# Allegro board CC1350SensorTag.brd
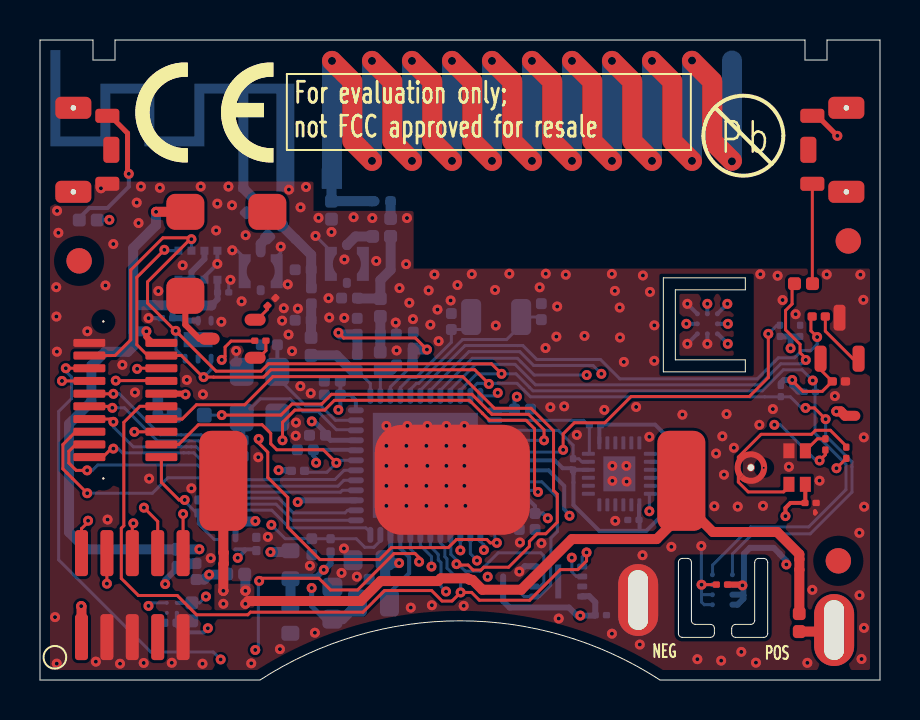
[diagram p0: board, top side]
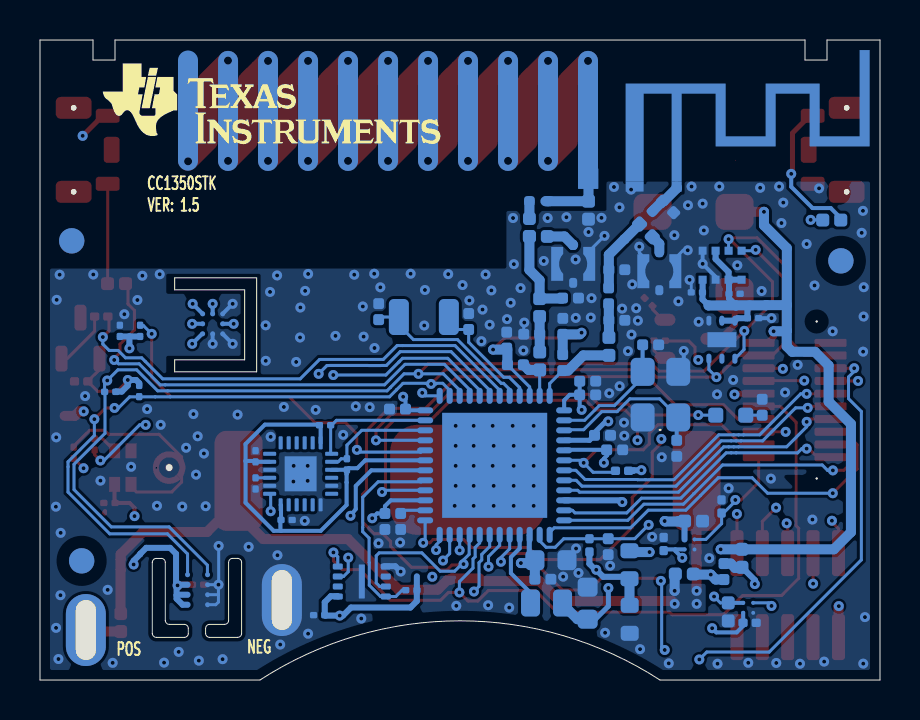
[diagram p1: board, bottom side, seen from below]

Outline 42 x 32 mm; copper layers: TOP, L2, L3, BOTTOM. Coordinates in mm from the lower left corner of the outline.
Outline path: 0,32 0,0 11,0 arc(21,2.96) 31,0 42,0 42,32 39.35,32 39.35,31 38.25,31 38.25,32 3.75,32 3.75,31 2.65,31 2.65,32 0,32 ; 31.17,20.11 31.17,15.41 35.27,15.41 35.27,16.01 31.77,16.01 31.77,19.51 35.27,19.51 35.27,20.11 31.17,20.11 ; 31.92,5.88 31.92,2.33 arc(31.98,2.19) 32.12,2.13 33.52,2.13 arc(33.66,2.19) 33.72,2.33 33.72,2.58 arc(33.66,2.72) 33.52,2.78 32.77,2.78 arc(32.63,2.84) 32.57,2.98 32.57,5.88 arc(32.51,6.02) 32.37,6.08 32.12,6.08 arc(31.98,6.02) 31.92,5.88 ; 34.58,2.58 arc(34.64,2.72) 34.78,2.78 35.53,2.78 arc(35.68,2.84) 35.73,2.98 35.73,5.88 arc(35.79,6.02) 35.93,6.08 36.18,6.08 arc(36.33,6.02) 36.38,5.88 36.38,2.33 arc(36.33,2.19) 36.18,2.13 34.78,2.13 arc(34.64,2.19) 34.58,2.33 34.58,2.58

## Placement (name value [footprint] x y rotation side)
A1  2.4GHz  [ANTENNA_AN043AN_BN]  10.17 24.67 180 bottom
A2  #VALUE  [ANTENNA868_915MHZ_MIRROR]  14.6 20.03 180 bottom
ANT2  0.5pF  [CAPC1005X60B2N]  12.02 22.8 135 bottom
ANT3  0.4pF  [CAPC1005X60N#2]  10.88 23.93 225 bottom
ANT4  10nH  [INDC1005X60B2N]  17.53 23.94 180 bottom
ANT5  4.7pF  [CAPC1005X60N]  14.57 23.94 270 bottom
BAT+1  BAT+  [PAD_S2000OBL3600_1000M3000]  39.71 2.5 0 top
BAT-1  BAT-  [PAD_S2000OBL3600_1000M3000]  29.91 4 0 top
BT1  BAT-HLD-001  [BAT_BATHLD001N]  32.07 9.96 180 top
BZ1  HCS0503B  [BUZ_HCS0503BN]  7.27 23.41 270 top
C1  DNM  [CAPC1608X90L]  12.52 3.74 270 bottom
C2  100nF  [CAPC1005X60L]  23.73 13.55 0 bottom
C3  100nF  [CAPC1005X60L]  24.75 8.33 270 bottom
C4  100nF  [CAPC1005X60L]  13.67 11.51 180 bottom
C5  22uF  [CAPC1608X100A2N]  17.25 5.99 180 bottom
C6  100nF  [CAPC1005X60L]  17.26 5.04 180 bottom
C7  22uF  [CAPC1608X100A2N]  14.62 3.04 90 bottom
C8  100nF  [CAPC1005X60L]  15.02 14.26 180 bottom
C9  100nF  [CAPC1005X60L]  14.28 12.23 180 bottom
C10  DNM_0402  [CAPC1005X60L]  14.21 14.94 0 bottom
C11  15pF  [CAPC1005X60N]  13.55 16.23 90 bottom
C12  1pF  [CAPC1005X60L]  12.76 17.99 0 bottom
C13  1pF  [CAPC1005X60L]  12.76 20.51 0 bottom
C14  120pF  [CAPC1005X60N]  17.01 15.5 90 bottom
C15  5.6pF  [CAPC1005X60N#2]  17.01 17.29 0 bottom
C16  1.8pF  [CAPC1005X60N#2]  15.88 19.1 180 bottom
C17  100nF  [CAPC1005X60L]  13.59 7.07 270 bottom
C18  12pF  [CAPC1005X60L]  20.57 17.52 90 bottom
C19  12pF  [CAPC1005X60L]  25.07 18.02 90 bottom
C20  1uF  [CAPC1005X60L]  23.97 8.33 270 bottom
C21  DNM_0402  [CAPC1005X60L]  11.07 16.76 0 bottom
C22  DNM_0402  [CAPC1005X60L]  10.16 11.19 90 bottom
C23  68pF  [CAPC1005X60L]  18.66 16.59 90 bottom
C24  6.8pF  [CAPC1005X60L]  15.86 17.28 90 bottom
C27  100nF  [CAPC0603X35N#2]  27.76 3.24 0 bottom
C28  100nF  [CAPC0603X35N#2]  8.88 19.38 0 bottom
C29  100nF  [CAPC0603X35N#2]  7.55 19.31 180 bottom
C30  100nF  [CAPC0603X35N#2]  38.01 17.18 90 bottom
C31  100nF  [CAPC0603X35N#2]  34.38 4.77 180 top
C32  100nF  [CAPC0603X35N#2]  38.25 8.85 0 top
C33  100nF  [CAPC0603X35N#2]  6.63 18.09 180 bottom
C34  100nF  [CAPC0603X35N#2]  29.95 8 180 bottom
C35  10nF  [CAPC0603X35L]  31.22 10.91 90 bottom
C36  100nF  [CAPC0603X35N#2]  31.22 9.55 90 bottom
C37  100nF  [CAPC0603X35N]  39.61 14.93 0 top
C40  100nF  [CAPC0603X35N]  10.82 6.47 90 bottom
C41  1uF  [CAPC1005X60N]  9.77 7.95 180 bottom
C42  1uF  [CAPC1005X60N]  7.59 3.86 270 bottom
C43  100nF  [CAPC0603X35N]  6.85 2.86 180 bottom
CR1  LS L296-P2Q2-1  [LEDC1708X67L]  6.71 13.24 0 bottom
FIDU1  FIDU_1.27mm  [FID127X142]  40.41 21.95 0 top
FIDU2  FIDU_1.27mm  [FID127X142]  39.92 5.96 0 top
FIDU3  FIDU_1.27mm  [FID127X142]  1.96 20.96 0 top
FIDU4  FIDU_1.27mm  [FID127X142]  1.96 20.96 180 bottom
FIDU5  FIDU_1.27mm  [FID127X142]  40.41 21.96 180 bottom
FIDU6  FIDU_1.27mm  [FID127X142]  39.92 5.96 180 bottom
FL1  BLM18HE152SN1  [FIL_BLM18HE152SN1DL]  12.53 5.06 90 bottom
J1  LSS-110-01-F-DV-A-TR  [SAMTEC_LSS-110-01-F-DV-A-TR-20N]  6.07 16.86 180 top
J10  MM5829-2700  [MURATA_MM58292700RJ4_A2N]  15.34 21.76 270 bottom
J12  MM5829-2700  [MURATA_MM58292700RJ4_A2N]  11.04 21.39 270 bottom
L1  6.8uH  [INDC2012X150L]  17.47 3.85 180 bottom
L2  2.4nH  [INDC1005X60L]  13.57 18.81 90 bottom
L7  5.6nH  [INDC1005X60N]  17.02 18.17 90 bottom
L15  68nH  [INDC1005X60L]  18.63 15.76 180 bottom
L16  15nH  [INDC1005X60L]  15.87 16.27 270 bottom
LBL1  -  [LABEL_FOR_EVALUATION_ONLY]  12.49 26.65 0 top
LBL2  CE_label  [CE_LABEL]  7.39 25.88 0 top
NOREF  -  []  0 31.7 0 top
NOREF#2  -  []  38.25 31.41 0 top
NOREF#3  -  []  39.35 31.5 0 top
NOREF#4  -  []  3.16 31 90 top
NOREF#5  -  []  35.34 2.13 90 top
NOREF#6  -  []  31.17 18.42 0 top
NOREF#7  -  []  34.44 19.51 90 top
NOREF#8  -  []  41.33 0 90 top
NOREF#9  -  []  3.75 31.49 0 top
NOREF#10  -  []  31.92 3.6 0 top
NOREF#11  -  []  36.32 24.95 180 bottom
P1  BB02-BS101-KA8-025B00  [GRADCON_BB02BS101KA8025B00N]  2.08 2.14 0 top
Q1  BC846B  [SOT95P237X130-3N]  10.76 16.11 90 top
R1  100k  [RESC0603X35N#2]  14.53 7.06 270 bottom
R2  10k  [RESC0603X35N]  27.47 12.74 0 bottom
R3  10k  [RESC0603X35N]  26.65 11.06 270 bottom
R4  10k  [RESC0603X35N]  38.77 14.41 180 bottom
R5  10k  [RESC0603X35N]  37.04 14.17 90 bottom
R6  200k  [RESC0603X35N#2]  12.57 10.46 0 bottom
R7  10k  [RESC0603X35N]  11.3 16.96 180 top
R8  5.1  [RESC0603X35L]  11.77 19.1 225 top
R9  0  [RESC1005X40A2N]  6.9 6.54 270 bottom
R10  0  [RESC1005X40A2N]  16.63 22.18 0 bottom
R11  0  [RESC1005X40A2N]  17.53 23.07 270 bottom
R12  0  [RESC1005X40A2N]  10.23 5.3 180 bottom
R13  2.2k  [RESC0603X35N]  23.71 4.49 180 bottom
R16  680  [RESC1005X40N#2]  5.89 14.04 270 bottom
R17  270  [RESC1005X40N]  38.62 19.82 180 top
R18  270  [RESC1005X40N]  1.96 23 0 bottom
R19  0  [RESC0603X35N#2]  38.61 18.18 0 top
R20  2.2k  [RESC0603X35L]  36.99 17.74 270 bottom
R21  0  [RESC0603X35N]  40.31 11.64 270 top
R22  0  [RESC0603X35N]  39.27 12.06 270 top
R23  DNM  [RESC1005X40N#2]  7.8 5.82 270 bottom
R24  0  [RESC1005X40A2N]  11.38 22.16 45 bottom
R26  0  [RESC1005X40A2N]  37.96 2.42 90 top
R28  100k  [RESC0603X35N#2]  7.92 9.01 270 bottom
SW1  MTA2-WNC  [SW_MTA2AN]  38.62 28.21 270 top
SW2  MTA2-WNC  [SW_MTA2AN]  3.37 24.81 90 top
U1  CC1350F128RGZ  [QFNFC50P700X700X80-49CN]  16.52 14.21 0 bottom
U2  TPS22910AYZV  [BGAFC4C50P89X89X50]  9.77 6.53 180 bottom
U3  BMP280  [XDCR_BMP280N]  8.87 21.46 270 bottom
U4  TMP007  [BGAFC8C50P187X189X63]  32.87 17.31 90 bottom
U5  HDC1000YPA  [BGAFC8C50P159X204X68]  34.62 5.26 270 bottom
U6  SPH0641LM4H-1  [MIC_SPH0641LM4H-1AN]  38.27 11.46 180 top
U7  OPT3001  [SON65P200X200X65-7N]  7.25 17.97 0 bottom
U8  MPU-9250  [QFNFC40P300X300X105-25L]  27.97 11.86 0 bottom
U9  DRV5032FBDBZR  [SOT95P237X112-3A2N]  39.03 16.07 0 top
U10  MX25R8035FZUIL0  [SON50P300X200X60-9B2N]  24.71 4.17 90 bottom
U11  TPS22910AYZV  [BGAFC4C50P89X89X50]  6.84 3.36 180 bottom
Y1  32.768kHz  [XTAL_FC-135N]  21.56 18.15 0 bottom
Y2  24MHz  [OSCCC250X320X60-4N]  11.87 15.41 270 bottom

## Library data of the parts
A1 = ANTENNA_AN043
A2 = ANTENNA: User Part Number: #PN
ANT2 ANT5 = CAPACITOR: User Part Number: #PN
ANT3 C2-C4 C6 C8-C10 C12 C13 C16-C24 = CAPACITOR: alternate symbols: (CAPC1005X60L,CAPC1005X60M)
ANT4 = INDUCTOR: User Part Number: #PN
BAT+1 = BAT+
BAT-1 = BAT-
BT1 = BATT_3PINS: User Part Number: #PN; alternate symbols: (BAT_BATHLD001L,BAT_BATHLD001M,BAT_BATHLD001AL,BAT_BATHLD001AM)
BZ1 = BUZZER_3PINS: alternate symbols: (BUZ_HCS0503BL,BUZ_HCS0503BM)
C1 = CAPACITOR: alternate symbols: (CAPC1608X90L,CAPC1608X90M)
C5 C7 = CAPACITOR: User Part Number: #PN; alternate symbols: (CAPC1608X100A2L,CAPC1608X100A2M)
C11 C14 C41 C42 = CAPACITOR: User Part Number: #PN; alternate symbols: (CAPC1005X60L,CAPC1005X60M)
C15 = CAPACITOR: alternate symbols: (CAPC1005X60M,CAPC1005X60L)
C27-C37 C40 C43 = CAPACITOR: alternate symbols: (CAPC0603X35L,CAPC0603X35M)
CR1 = LED: alternate symbols: (LEDC1708X67L,LEDC1708X67M)
FIDU1-FIDU6 = FIDMARK
FL1 = FILTER_2PIN: alternate symbols: (FIL_BLM18HE152SN1DL,FIL_BLM18HE152SN1DM)
J1 = CONN_SOCKET_2X10_J_V1: alternate symbols: (SAMTEC_LSS-110-01-F-DV-A-TR-20L,SAMTEC_LSS-110-01-F-DV-A-TR-20M)
J10 J12 = CONN_COAX_1_1_P_2MH_V1: User Part Number: #PN; alternate symbols: (MURATA_MM58292700RJ4_A2L,MURATA_MM58292700RJ4_A2M)
L1 = INDUCTOR: alternate symbols: (INDC2012X150L,INDC2012X150M)
L2 L7 L16 = INDUCTOR: alternate symbols: (INDC1005X60L,INDC1005X60M)
L15 = INDUCTOR: alternate symbols: (IND_LQW15AL,IND_LQW15AM,INDC1005X60L,INDC1005X60M)
LBL1 = LABEL_FOR_EVALUATOIN_ONLY: User Part Number: #PN
LBL2 = CE_LABEL
P1 = CONN_HEADER_2X5_P: User Part Number: #PN; alternate symbols: (GRADCON_BB02BS101KA8025B00L,GRADCON_BB02BS101KA8025B00M)
Q1 = TRANSISTOR_NPN_BEC_CIR: alternate symbols: (SOT95P237X130-3L,SOT95P237X130-3M)
R1-R8 R13 R19-R22 R28 = RESISTOR: alternate symbols: (RESC0603X35L,RESC0603X35M)
R9-R12 R24 R26 = RESISTOR: alternate symbols: (RESC1005X40A2L,RESC1005X40A2M)
R16-R18 R23 = RESISTOR: alternate symbols: (RESC1005X40L,RESC1005X40M)
SW1 SW2 = SWITCH_2PIN
U1 = IC_RF_CC13XX_7X7_QFN48_V2: alternate symbols: (QFNFC50P700X700X80-49CL,QFNFC50P700X700X80-49CM)
U2 U11 = IC_PM_TPS22910A_DSBGA4: User Part Number: #PN
U3 = IC_PERIPH_BMP280
U4 = IC_PERIPH_TMP007_DSBGA8: User Part Number: #PN
U5 = IC_PERIPH_HDC1000_BGA8: User Part Number: #PN
U6 = IC_PERIPH_SPH0641LM4H-1
U7 = IC_PERIPH_OPT3001_SON6: User Part Number: #PN; alternate symbols: (SON65P200X200X65-7L,SON65P200X200X65-7M)
U8 = IC_ACC_MPU-9250_QFN24: alternate symbols: (QFNFC40P300X300X105-25L,QFNFC40P300X300X105-25M)
U9 = IC_PERIPH_DRV5032_SOT23-3: User Part Number: #PN; alternate symbols: (SOT95P237X112-3A2L,SOT95P237X112-3A2M)
U10 = IC_FLASH_MX25R8035F_USON8: User Part Number: #PN; alternate symbols: (SON50P300X200X60-9B2L,SON50P300X200X60-9B2M)
Y1 = CRYSTAL: alternate symbols: (XTAL_FC-135L,XTAL_FC-135M)
Y2 = XTAL_4PIN_S: alternate symbols: (OSCCC250X320X60-4L,OSCCC250X320X60-4M)

## Footprints (pads in the part's own frame, mm; a bottom-side part is the same pattern mirrored in y, then rotated)
ANTENNA868_915MHZ_MIRROR
  rect 1x1 smd: 1(0.014,5.033)
ANTENNA_AN043AN_BN
  rect 0.5x0.5 smd: 1(0,0)
  rect 0.9x0.5 smd: 2(-2.1,0)
BAT_BATHLD001N
  custom 2.4x5 smd: 1(0,0) 2(22.9,0)
  custom 7.75x5.5 smd: 3(11.45,-0.05)
BGAFC4C50P89X89X50
  round 0.2 smd: A1(0,0) A2(0,0.5) B1(0.5,0) B2(0.5,0.5)
BGAFC8C50P159X204X68
  round 0.25 smd: A1(0,0) A2(0,1) B1(0.5,0) B2(0.5,1) C1(1,0) C2(1,1) D1(1.5,0) D2(1.5,1)
BGAFC8C50P187X189X63
  round 0.25 smd: A1(0,0) A2(0,0.5) A3(0,1) B1(0.5,0) B3(0.5,1) C1(1,0) C2(1,0.5) C3(1,1)
BUZ_HCS0503BN
  custom 1.798x1.9 smd: 1(0,0) 2(4.2,0) 3(0,4.1)
CAPC0603X35L
  custom 0.36x0.32 smd: 1(0,0) 2(0.56,0)
CAPC0603X35N
  custom 0.46x0.42 smd: 1(0,0) 2(0.66,0)
CAPC0603X35N#2
  custom 0.36x0.32 smd: 1(0,0) 2(0.56,0)
CAPC1005X60B2N
  custom 0.525x0.5 smd: 1(0,0) 2(0.924,0)
CAPC1005X60L
  custom 0.55x0.54 smd: 1(0,0) 2(0.8,0)
CAPC1005X60N
  custom 0.65x0.64 smd: 1(0,0) 2(0.9,0)
CAPC1005X60N#2
  custom 0.55x0.54 smd: 1(0,0) 2(0.8,0)
CAPC1608X90L
  custom 0.75x0.9 smd: 1(0,0) 2(1.4,0)
CAPC1608X100A2N
  custom 0.95x1 smd: 1(0,0) 2(1.6,0)
CE_LABEL
  oval 0.025x0.051 smd: 1(-0.15,0.1)
FID127X142
  round 1.27 smd: 1(0,0)
FIL_BLM18HE152SN1DL
  custom 0.75x0.9 smd: 1(0,0) 2(1.4,0)
GRADCON_BB02BS101KA8025B00N
  custom 0.65x2.3 smd: 1(0,0) 2(0,4.2) 3(1.27,0) 4(1.27,4.2) 5(2.54,0) 6(2.54,4.2) 7(3.81,0) 8(3.81,4.2) 9(5.08,0) 10(5.08,4.2)
INDC1005X60B2N
  custom 0.525x0.5 smd: 1(0,0) 2(0.924,0)
INDC1005X60L
  custom 0.55x0.54 smd: 1(0,0) 2(0.8,0)
INDC1005X60N
  custom 0.65x0.64 smd: 1(0,0) 2(0.9,0)
INDC2012X150L
  custom 0.95x1.35 smd: 1(0,0) 2(1.6,0)
LEDC1708X67L
  custom 0.75x0.75 smd: 1(0,0) 2(1.5,0)
MIC_SPH0641LM4H-1AN
  custom 1.626x1.626 hole 0.325 unplated: (2.724,0.838)
  rect 0.55x0.75 smd: 1(0,0) 2(0.822,0) 4(0.822,1.675) 5(0,1.675)
MURATA_MM58292700RJ4_A2N
  custom 0.5x0.4 smd: 1(0,0) 2(1.9,0)
  custom 1.7x0.6 smd: M1(0.95,-0.8) M2(0.95,0.8)
OSCCC250X320X60-4N
  custom 1.4x1.2 smd: 1(0,0) 2(2.28,0) 3(2.28,1.78) 4(0,1.78)
PAD_S2000OBL3600_1000M3000
  oval 2x3.6 hole 1x3: 1(0,0)
QFNFC40P300X300X105-25L
  custom 0.2x0.65 smd: 1(0,0) 2(0.4,0) 3(0.8,0) 4(1.2,0) 5(1.6,0) 6(2,0) 13(2,3.1) 14(1.6,3.1) 15(1.2,3.1) 16(0.8,3.1) 17(0.4,3.1) 18(0,3.1)
  custom 0.65x0.2 smd: 7(2.55,0.55) 8(2.55,0.95) 9(2.55,1.35) 10(2.55,1.75) 11(2.55,2.15) 12(2.55,2.55) 19(-0.55,2.55) 20(-0.55,2.15) 21(-0.55,1.75) 22(-0.55,1.35) 23(-0.55,0.95) 24(-0.55,0.55)
  rect 1.6x1.75 smd: 25(1,1.55)
QFNFC50P700X700X80-49CN
  oval 0.3x0.8 smd: 1(0,0) 2(0.5,0) 3(1,0) 4(1.5,0) 5(2,0) 6(2.5,0) 7(3,0) 8(3.5,0) 9(4,0) 10(4.5,0) 11(5,0) 12(5.5,0) 25(5.5,6.95) 26(5,6.95) 27(4.5,6.95) 28(4,6.95) 29(3.5,6.95) 30(3,6.95) 31(2.5,6.95) 32(2,6.95) 33(1.5,6.95) 34(1,6.95) 35(0.5,6.95) 36(0,6.95)
  oval 0.8x0.3 smd: 13(6.225,0.725) 14(6.225,1.225) 15(6.225,1.725) 16(6.225,2.225) 17(6.225,2.725) 18(6.225,3.225) 19(6.225,3.725) 20(6.225,4.225) 21(6.225,4.725) 22(6.225,5.225) 23(6.225,5.725) 24(6.225,6.225) 37(-0.725,6.225) 38(-0.725,5.725) 39(-0.725,5.225) 40(-0.725,4.725) 41(-0.725,4.225) 42(-0.725,3.725) 43(-0.725,3.225) 44(-0.725,2.725) 45(-0.725,2.225) 46(-0.725,1.725) 47(-0.725,1.225) 48(-0.725,0.725)
  rect 5.25x5.25 smd: 49(2.75,3.475)
RESC0603X35L
  custom 0.36x0.32 smd: 1(0,0) 2(0.56,0)
RESC0603X35N
  custom 0.36x0.32 smd: 1(0,0) 2(0.56,0)
RESC0603X35N#2
  custom 0.46x0.42 smd: 1(0,0) 2(0.66,0)
RESC1005X40A2N
  custom 0.65x0.64 smd: 1(0,0) 2(0.9,0)
RESC1005X40N
  custom 0.65x0.64 smd: 1(0,0) 2(0.9,0)
RESC1005X40N#2
  custom 0.55x0.54 smd: 1(0,0) 2(0.8,0)
SAMTEC_LSS-110-01-F-DV-A-TR-20N
  round 0.1 hole 0.9 unplated: (2.9,6.782) (2.9,-1.067)
  custom 1.6x0.4 smd: 1(0,0) 2(3.6,0) 3(0,0.635) 4(3.6,0.635) 5(0,1.27) 6(3.6,1.27) 7(0,1.905) 8(3.6,1.905) 9(0,2.54) 10(3.6,2.54) 11(0,3.175) 12(3.6,3.175) 13(0,3.81) 14(3.6,3.81) 15(0,4.445) 16(3.6,4.445) 17(0,5.08) 18(3.6,5.08) 19(0,5.715) 20(3.6,5.715)
SON50P300X200X60-9B2N
  custom 0.3x0.5 smd: 1(0,0) 2(0.5,0) 3(1,0) 4(1.5,0) 5(1.5,2.4) 6(1,2.4) 7(0.5,2.4) 8(0,2.4)
  rect 1.7x0.3 smd: 9(0.75,1.2)
SON65P200X200X65-7N
  oval 0.25x0.5 smd: 1(0,0) 2(0.65,0) 3(1.3,0) 4(1.3,1.9) 5(0.65,1.9) 6(0,1.9)
  rect 1.45x0.75 smd: 7(0.65,0.95)
SOT95P237X112-3A2N
  custom 0.6x1.3 smd: 1(0,0) 2(1.9,0) 3(0.95,2.05)
SOT95P237X130-3N
  oval 0.6x1.05 smd: 1(0,0) 2(1.9,0) 3(0.95,2.3)
SW_MTA2AN
  custom 1.1x1.8 hole 0.9: (-0.4,1.7) (3.8,1.7)
  custom 1.3x0.8 smd: (1.7,-0.2)
  custom 0.7x1.2 smd: 1(0,0) 2(3.4,0)
XDCR_BMP280N
  rect 0.4x0.4 smd: 1(0,0) 2(0,0.65) 3(0,1.3) 4(0,1.95) 5(1.45,1.95) 6(1.45,1.3) 7(1.45,0.65) 8(1.45,0)
XTAL_FC-135N
  custom 1x1.8 smd: 1(0,0) 2(2.5,0)

## Nets
GND: A1.2(FEED) ANT3.2 ANT5.2 BAT-1.1 BT1.3(-) C1.2 C2.2 C3.2 C4.2 C5.2 C6.2 C7.2 C8.2 C9.2 C10.1 C12.1 C13.1 C15.2 C16.2 C17.2 C18.2 C19.2 C20.2 C21.1 C22.1 C23.2 C24.2 C27.2 C28.2 C29.2 C30.2 C31.2 C32.2 C33.2 C34.2 C35.2 C36.1 C37.2 C40.2 C41.2 C42.2 C43.2 J1.2 J10.2 J10.M1 J10.M2 J12.2 J12.M1 J12.M2 P1.3 P1.5 P1.9 R8.1 R16.1 R28.1 SW1.1 SW2.1 U1.49(VSS) U2.B1(GND) U3.1(GND#1) U3.7(GND#7) U4.A1(DGND) U4.A2(AGND) U4.C1(ADR0) U5.B2(GND) U5.C2(DNC) U5.D2(NDRDY) U6.2(SELECT) U7.3(GND) U7.7(EGP/GND) U8.9(AD0/SDO) U8.11(FSYNC) U8.18(GND) U8.20(RESV_20) U8.25(EGP) U9.3(GND) U10.4(GND) U10.9(EGP) U11.B1(GND) Y2.2 Y2.4
VDD: BZ1.1 C27.1 C28.1 C29.1 C30.1 C31.1 C33.1 C37.1 C43.1 FL1.2 J1.1 P1.1 R4.2 R5.2 R6.1 R9.1 R13.2 R20.2 U1.39(DIO_26) U3.2(CSB) U3.5(SDO) U3.6(VDDIO) U3.8(VDD) U4.A3(V+) U4.B1(ADR1) U5.B1(VDD) U5.C1(ADR0) U5.D1(ADR1) U7.1(VDD) U7.2(ADDR) U9.1(VCC) U10.8(VCC) U11.A1(VOUT)
VDD_BATT: BT1.1(+#1) BT1.2(+#2) R12.1 R26.2
VDDR: C7.1 C8.1 C9.1 C10.2 L1.2 U1.45(VDDR#45) U1.48(VDDR#48)
VDDS: C1.1 C2.1 C3.1 C4.1 C5.1 C6.1 FL1.1 R1.2 U1.13(VDDS2) U1.22(VDDS3) U1.34(VDDS_DCDC) U1.44(VDDS)
AUDIO DI: R22.2 U1.7(DIO_2)
BUTTON1: R17.2 U1.9(DIO_4)
BUTTON2: R18.2 U1.21(DIO_15)
BUZZER: R7.2 U1.31(DIO_21)
DCDC_SW: L1.1 U1.33(DCDC_SW)
DEVPACK->VDD: J1.9 R9.2 R23.1
DP0: J1.20 U1.38(DIO_25)
DP1: J1.18 U1.37(DIO_24)
DP2: J1.16 U1.36(DIO_23)
DP3: J1.14 U1.40(DIO_27)
DP4/UART_RX: J1.12 U1.41(DIO_28)
DP5/UART_TX: J1.10 U1.42(DIO_29)
DP6/AUDIO DO: J1.8 U1.32(DIO_22)
DP7/AUDIO CLK: J1.6 R21.2 U1.8(DIO_3)
DP8/SCLK/TDI: J1.15 P1.8 U1.27(DIO_17) U10.6(SCLK)
DP9/MISO: J1.13 U1.28(DIO_18) U10.2(SO/SIO1)
DP10/MOSI: J1.11 U1.29(DIO_19) U10.5(SI/SIO0)
DP11/CSN: J1.7 U1.30(DIO_20)
DP12/AUDIO FS/TDO: J1.5 P1.6 U1.26(DIO_16)
DP ID: J1.17 R6.2 U1.43(DIO_30)
FLASH_CS: R13.1 U1.20(DIO_14) U10.1(NCS)
JTAG_TCK: P1.4 U1.25(JTAG_TCKC)
JTAG_TMS: P1.2 U1.24(JTAG_TMSC)
LED1: CR1.2(A) U1.16(DIO_10)
MIC PWR: C32.1 U1.19(DIO_13) U6.5(VDD)
MPU INT: U1.12(DIO_7) U8.12(INT)
MPU PWR: C34.1 C35.1 R2.2 R3.2 U1.18(DIO_12) U8.1(RESV_1) U8.8(VDDIO) U8.13(VDD) U8.22(NCS)
NRESET: C17.1 P1.10 R1.1 U1.35(RESET_N)
POWER GOOD: J1.19 R28.2 U2.B2(ON) U11.B2(ON)
REED: R19.1 U1.6(DIO_1)
RX/TX: C23.1 C24.1 L15.1 L16.1 U1.3(RX_TX)
SCL: J1.3 R5.1 U1.11(DIO_6) U3.4(SCK) U4.B3(SCL) U5.A1(SCL) U7.4(NCLK)
SCL HP: R3.1 U1.15(DIO_9) U8.23(SCL/SCLK)
SDA: J1.4 R4.1 U1.10(DIO_5) U3.3(SDI) U4.C3(SDA) U5.A2(SDA) U7.6(DATA)
SDA HP: R2.1 U1.14(DIO_8) U8.24(SDA/SDI)
TMP RDY: R20.1 U1.17(DIO_11) U4.C2(NALERT)
N256047: CR1.1(C) R16.2
N540621: R22.1 U6.1(DATA)
N546170: C36.2 U8.10(REGOUT)
N553359: BZ1.2 Q1.3(COLLECTOR)
N553749: Q1.1(BASE) R7.1
N553802: Q1.2(EMITTER) R8.2
N567147: C41.1 R12.2 R23.2 U2.A2(VIN)
N570925: C20.1 U1.23(DCOUPL)
N571021: C18.1 U1.4(X32K_Q1) Y1.1
N584167: C21.2 U1.47(X24M_P) Y2.1
N584795: C22.2 U1.46(X24M_N) Y2.3
N593616: R17.1 SW1.2
N593675: R18.1 SW2.2
N595089: C19.1 U1.5(X32K_Q2) Y1.2
N615347: R21.1 U6.4(CLOCK)
N620089: BAT+1.1 R26.1
N635643: C40.1 C42.1 U2.A1(VOUT) U11.A2(VIN)
N643348: C14.2 C15.1 L7.1
N647149: A1.1(GND) ANT2.2 ANT3.1
N651267: C11.1 L16.2 U1.1(RF_P)
N651373: C11.2 C12.2 L2.1
N651497: ANT2.1 C13.2 L2.2 R24.2
N652643: C14.1 L15.2 U1.2(RF_N)
N654018: A2.1(FEED/GND_1) ANT4.2 ANT5.1
N667700: C16.1 L7.2 R10.2 R11.2
N684660: J10.1 R10.1
N686248: J12.1 R24.1
N721382: R19.2 U9.2(OUT)
N6819820: ANT4.1 R11.1

Pads without a net: BZ1 3; FIDU1 1; FIDU2 1; FIDU3 1; FIDU4 1; FIDU5 1; FIDU6 1; LBL2 1; P1 7; U7 5; U8 2 3 4 5 6 7 14 15 16 17 19 21; U10 3 7

## Via types
v1: diameter 0.5, hole 0.2, TOP to BOTTOM, 300 vias
v2: diameter 0.8, hole 0.4, TOP to BOTTOM, 20 vias
v3: diameter 0.1, hole 0.6, TOP to BOTTOM, 1 via

## Routing (per net, layer and track width the routed paths; a pad name or vN(x,y) marks a point on that pad's centre or on a via; arc(x,y) is an arc through that point)
GND: length 28
  TOP w0.15: SW2.1 3.14,24.58 v1(3.05,24.58) ; 19.37,17.7 19.46,17.7 v1(19.52,17.76) ; C31.2 33.08,4.77 v1(33.08,4.76) ; 38.83,8.37 38.75,8.45
  TOP w0.2: 38.75,8.45 38.75,8.31
  TOP w0.25: v1(39.87,27.21) 38.87,28.21 SW1.1
  L3 w0.25: v1(39.87,27.21) 41.02,26.06 v1(41.02,20.26) 41.02,19.83
  BOTTOM w0.15: v1(17.79,17.87) 17.81,17.84 17.81,17.29 ; 33.1,6.71 33.08,6.69 ; v1(13.78,22.21) 14.54,21.45 14.54,20.91 ; U5.D2 33.21,3.76 33.08,3.9 33.08,4.27 ; 33.08,4.27 33.08,4.26 U5.C2 33.61,4.25 ; 33.08,4.27 v1(33.08,4.76) ; J12.M1 11.84,21.17 12.04,21.37 v1(12.04,21.67) ; v1(33.08,4.76) 33.08,4.76 U5.B2 ; v1(33.08,4.76) 33.07,4.78 v1(33.07,6.7) ; v1(9.52,20.01) 9.44,19.92 9.44,19.38 ; J12.M2 10.23,21.09 9.84,21.49 v1(9.61,21.49) ; 12.27,17.97 v1(12.11,17.97)
  BOTTOM w0.2: 10.17,15.41 9.81,15.76 9.81,15.79 ; U3.7 8.22,20.16 v1(8.87,20.81) 8.87,21.46 U3.1 ; 9.81,15.79 9.85,15.82 ; 9.81,15.79 v1(9.81,16.45) 9.86,16.5 ; C33.2 5.43,18.09 v1(5.43,18.09) ; 30.52,12.16 v1(30.47,12.16) ; U4.C1 v1(32.37,18.81) ; U4.A1 v1(32.37,16.81) ; U4.A2 v1(33.37,16.81)
  BOTTOM w0.3: v1(23.97,5.42) 24.24,5.69 24.79,5.69
  vias: v1(0.81,19.64) v1(0.82,18.17) v1(0.84,16.42) v1(0.75,3.15) v1(0.84,0.82) v1(0.85,23.46) v1(0.92,22.36) v1(2.37,17.44) v1(2.79,0.92) v1(3.27,19.73) v1(3.38,8.02) v1(3.67,21.8) v1(4,0.81) v1(4.12,15.76) v1(4.75,14.38) v1(4.84,23.87) v1(4.93,22.85) v1(5.04,24.67) v1(5.19,0.85) v1(5.46,10.07) v1(5.92,19.45) v1(5.99,24.61) v1(6.59,0.86) v1(7.13,20.73) v1(7.34,15.01) v1(7.57,9.58) v1(8.04,24.67) v1(8.15,14.28) v1(8.12,0.81) v1(8.54,6.09) v1(8.81,22.48) v1(8.87,23.82) v1(9.07,17.91) v1(9.42,24.67) v1(9.6,23.74) v1(10.08,18.93) v1(10.28,22.24) v1(10.56,0.83) v1(10.91,11.14) v1(11.39,7.16) v1(12,1.54) v1(12.19,18.59) v1(12.45,24.52) v1(12.39,19.78) v1(12.43,17.27) v1(12.6,16.45) v1(12.8,12.87) v1(12.79,12.21) v1(12.89,18.57) v1(13.03,23.63) v1(13.02,14.69) v1(13.3,24.65) v1(13.54,14.34) v1(13.49,5.71) v1(13.74,2.36) v1(13.93,23.11) v1(14.43,19.09) v1(14.46,18.12) v1(14.57,22.4) v1(15.08,5.35) v1(15.22,21.03) v1(15.21,18.11) v1(15.2,6.58) v1(15.68,23.14) v1(15.84,5.17) v1(16.62,23.1) v1(16.81,20.95) v1(17.32,12.71) v1(17.32,11.71) v1(17.32,10.71) v1(17.32,9.71) v1(17.32,8.71) v1(17.83,16.48) v1(17.97,19.59) v1(18.35,23.1) v1(18.31,20.79) v1(18.32,11.71) v1(18.32,10.71) v1(18.32,9.71) v1(18.32,8.71) v1(18.37,12.71) v1(18.47,18.86) v1(18.54,3.62) v1(18.65,18.04) v1(19.32,11.71) v1(19.32,9.71) v1(19.32,8.71) v1(19.43,19.48) v1(19.37,12.71) v1(19.37,10.71) v1(19.59,3.74) v1(19.72,20.27) v1(19.87,18.52) v1(19.93,16.94) v1(20.32,12.71) v1(20.32,11.71) v1(20.32,10.71) v1(20.32,9.71) v1(20.32,8.71) v1(20.53,18.98) v1(20.87,19.75) v1(21.22,12.71) v1(21.22,11.71) v1(21.22,10.71) v1(21.22,9.71) v1(21.18,3.71) v1(21.27,8.71) v1(21.59,20.29) v1(22.75,19.5) v1(22.79,17.72) v1(23.47,20.31) v1(24,6.88) v1(24.98,19.63) v1(25.07,6.84) v1(25.29,20.31) v1(25.27,16.6) v1(25.52,13.64) v1(25.82,17.17) v1(25.86,18.68) v1(25.94,3.07) v1(26.21,13.68) v1(26.29,20.26) v1(26.84,12.26) v1(27.23,17.21) v1(28.22,13.51) v1(28.59,20.3) v1(28.62,10.71) v1(28.62,9.96) v1(28.6,2.31) v1(28.74,19.46) v1(28.76,7.96) v1(28.98,18.62) v1(29,17.13) v1(29.19,15.9) v1(29.32,10.71) v1(29.33,9.92) v1(29.81,13.65) v1(29.99,1.77) v1(30.14,20.23) v1(30.13,6.24) v1(30.5,19.4) v1(30.72,17.73) v1(30.71,15.96) v1(31.57,6.66) v1(32.12,13.27) v1(32.87,1.04) v1(33.72,8.69) v1(33.8,11.32) v1(34.12,12.19) v1(34.06,0.97) v1(34.2,10.27) v1(34.33,13.3) v1(34.69,11.61) v1(34.89,8.67) v1(35.06,1.41) v1(35.8,0.87) v1(36.02,20.29) v1(35.97,12.76) v1(36.15,8.71) v1(36.64,13.55) v1(36.88,20.21) v1(37.13,19) v1(37.45,10.66) v1(37.78,18.29) v1(38.37,0.86) v1(38.62,4.51) v1(38.98,9.97) v1(39.34,20.27) v1(39.74,14.2) v1(40.97,7.36) v1(40.98,4.24) v1(41.08,1.05) v1(41.17,19.01) v1(41.19,12.13) v1(41.21,8.66) v1(41.2,2.61) v3(36.19,10.61)
VDD: length 147.1
  TOP w0.15: U9.1 39.03,15.52 C37.1 39.12,14.43 38.15,14.43 37.61,14.97 v1(37.61,15)
  TOP w0.3: v1(35.12,4.73) 35.08,4.77 C31.1 ; v1(5.32,17.44) 5.32,17.16 5.62,16.86 J1.1
  TOP w0.5: v1(39.82,13.43) 40.03,13.43 40.26,13.21 40.77,13.21 ; v1(2.06,3.69) 2.08,3.68 P1.1 ; BZ1.1 v1(5.8,23.41)
  L2 w0.15: v1(34.39,16.81) 34.07,16.81 33.06,17.82 32.33,17.82 v1(32.32,17.81)
  L2 w0.3: 36.55,16.29 37.24,16.29 v1(37.53,16.58) ; 36.55,16.29 36.54,16.3 36.49,16.3 35.99,16.81 v1(34.39,16.81) ; 36.55,16.29 36.73,16.11
  L2 w0.5: 27.02,3.84 27.02,3.22 v1(27.01,3.22) ; 27.02,3.84 27.02,4.17 30.21,7.37 36.38,7.37 37.24,6.51 ; 27.02,3.84 26.46,4.39 22.24,4.39 21.61,5.02 21.46,5.02 21.35,5.12 20.08,5.12 19.74,4.78 18.2,4.78 17.92,4.5 14.34,3.71 14.22,3.59 11.87,3.59 11.82,3.54 11.71,3.54 11.61,3.44 ; v1(11.52,6.4) 11.62,6.4 12.88,7.66 v1(12.88,8.89) 12.88,9.54 v1(11.93,10.49) ; v1(11.52,6.4) 11.61,6.31 11.61,3.44 ; v1(11.52,6.4) 11.41,6.51 11,6.51 10.73,6.78 8.21,6.78 v1(7.97,6.54) ; v1(39.82,13.43) 40.08,13.17 40.08,12.43 40.01,12.36 ; 37.24,6.51 37.32,6.43 v1(37.32,5.78) ; 37.24,6.51 37.94,6.51 40.71,9.29 40.71,11.65 40.01,12.36 ; 37.54,14.93 37.54,12.97 38.16,12.36 40.01,12.36 ; 37.54,14.93 37.54,15.3 36.73,16.11 ; 37.54,14.93 v1(37.61,15) ; v1(2.06,3.69) 3.17,2.59 v1(8.39,2.59) 8.4,2.58 10.76,2.58 11.61,3.44
  BOTTOM w0.15: 33.89,17.31 U4.A3 ; 23.16,4.46 23.15,4.47 23.15,4.49 23.16,4.49
  BOTTOM w0.2: v1(8.39,2.59) 8.19,2.38 7.17,2.38 6.85,2.7 C43.1 6.84,2.87 U11.A1 ; U4.B1 v1(32.32,17.81) ; v1(34.39,16.81) 33.89,17.31
  BOTTOM w0.3: 37.53,17.18 v1(37.53,16.58) ; 37.53,17.18 37,17.18 R20.2 ; 37.53,17.18 C30.1 ; v1(35.12,4.73) 35.2,4.8 35.2,6.31 35.5,6.61 36.69,6.61 36.99,6.31 36.99,6.29 37.32,5.96 v1(37.32,5.78) ; v1(35.12,4.73) 35.17,4.68 35.17,4.24 ; v1(35.12,4.73) 35.09,4.76 U5.B1 ; 7.2,18.73 7.55,19.08 C29.1 7.55,19.99 U3.6 ; R5.2 37.04,14.85 37.2,15 v1(37.61,15) 37.61,14.72 37.91,14.42 38.2,14.42 R4.2 ; 8.58,18.73 8.88,19.03 C28.1 8.87,19.39 U3.8 ; U5.C1 35.14,4.26 35.17,4.24 ; U3.6 7.57,20.4 8.22,21.05 U3.2 ; U3.6 U3.5 ; 27.11,4.17 27.13,4.19 27.46,4.19 27.76,3.89 C27.1 27.74,3.22 v1(27.01,3.22) 26.85,3.22 26.45,3.62 23.48,3.62 23.16,3.94 23.16,4.46 ; U7.2 U7.1 7.13,18.09 C33.1 6.63,18.63 6.53,18.73 ; U5.D1 34.87,3.76 35.17,4.06 35.17,4.24 ; v1(11.93,10.49) 12.01,10.49 12.01,10.49 12.31,10.49 12.34,10.46 R6.1 ; U1.39 12.97,8.98 v1(12.88,8.89) ; 23.16,5.18 23.16,4.49
  BOTTOM w0.5: 4.66,17.45 4.68,17.44 v1(5.32,17.44) ; 4.66,17.45 4.66,17.46 4.66,18.74 ; 4.66,17.45 4.66,16.68 4.39,16.41 3.25,16.41 2.57,15.72 2.57,13.92 1.45,12.8 1.45,7.39 2.31,6.54 R9.1 v1(7.97,6.54) ; 8.58,18.73 8.57,18.73 7.21,18.73 7.2,18.73 5.71,18.73 5.7,18.74 4.66,18.74 ; 4.66,18.74 4.66,21.59 5.8,22.74 v1(5.8,23.41) ; 12.53,6.46 12.46,6.4 v1(11.52,6.4)
VDD_BATT: length 42.2
  TOP w0.5: BT1.2 9.17,6.38 9.19,6.36 9.19,5.82 9.17,5.8 9.17,4.47 9.16,4.46 v1(9.17,4.46) ; R26.2 37.97,3.33 37.97,5.5 37.97,5.51 37.97,6.04 37.97,6.05 37.97,6.29 36.86,7.4 33.65,7.4 32.77,8.28 ; 32.77,8.28 32.06,8.28 30.84,7.05 26.6,7.05 24.06,4.51 22.12,4.51 21.62,5.01 21.53,5.01 21.52,5.02 21.46,5.02 21.4,5.08 20.04,5.08 19.91,4.95 17.03,4.95 16.03,3.95 10.41,3.95 v1(10.27,3.81) ; 32.77,8.28 32.07,8.98 BT1.1 ; 10.29,4.48 v1(10.27,4.46)
  BOTTOM w0.15: 10.24,4.49 v1(10.27,4.46)
  BOTTOM w0.5: v1(10.27,4.46) 10.27,5.27 R12.1
  vias: v1(9.17,3.81)
VDDR: length 20.8
  L2 w0.25: v1(13.58,4.6) 12.69,5.5 12.69,6.15 13.95,7.42 13.95,9.95 13.56,10.34 13.06,10.84 13.06,11.49 13.59,12.02 v1(13.59,12.93) 14.17,13.51 v1(14.92,13.51)
  BOTTOM w0.15: 15.02,14.94 C10.2
  BOTTOM w0.2: C8.1 15.52,14.26 15.79,13.98 U1.48 ; C8.1 15.02,13.61 v1(14.92,13.51) ; C8.1 15.02,14.94
  BOTTOM w0.25: C7.1 14.23,3.04 13.58,3.69 v1(13.58,4.6) ; U1.45 14.53,11.98 C9.1 14.28,12.37 13.71,12.93 v1(13.59,12.93)
  BOTTOM w0.5: C7.1 15.12,3.04 15.87,3.79 L1.2
VDDS: length 38.7
  L2 w0.3: 23.84,8.82 v1(23.84,14.16) ; 23.84,8.82 24.57,8.09 v1(25.39,8.09) ; 23.84,8.82 22.08,7.05 19.3,7.05 18.1,5.85 v1(17.95,5.85) 15.36,5.85 15.3,5.9 15.09,5.9 14.97,6.03 14.39,6.03 ; 14.39,6.03 14.39,5.98 14.31,5.9 14.31,5.63 v1(14.19,5.51) ; 14.39,6.03 14.39,10.26 13.81,10.84 v1(13.81,10.86)
  BOTTOM w0.2: U1.22 24.46,8.98 24.75,8.69 C3.1 25.15,8.33 v1(25.39,8.09) ; U1.44 15.77,11.51 C4.1 13.64,11.48 13.64,11.23 13.81,11.07 v1(13.81,10.86) ; U1.13 23.66,13.48 C2.1 23.73,14.04 v1(23.84,14.16)
  BOTTOM w0.25: C5.1 17.54,6.27 17.54,7.24 U1.34
  BOTTOM w0.3: 12.62,5.16 13.84,5.16 v1(14.19,5.51) 14.23,5.51 14.53,5.81 R1.2
  BOTTOM w0.5: 12.62,5.16 FL1.1 12.53,3.75 C1.1 ; v1(17.95,5.85) 17.4,5.85 17.26,5.99 ; C5.1 17.26,5.99 ; 17.26,5.99 C6.1
AUDIO DI: length 23.4
  TOP w0.15: 39.27,11.5 39.27,11.26 v1(38.98,10.97)
  L2 w0.153: v1(28.07,15.31) 28.09,15.29 29,15.29 30.28,14.01 35.47,14.01 v1(36.72,12.76)
  BOTTOM w0.15: U1.7 19.52,14.49 21.45,16.42 23.99,16.42
  BOTTOM w0.153: v1(28.07,15.31) 27.65,15.72 27.54,15.72 27.53,15.73 25.59,15.73 25.59,15.72 24.95,15.72 24.94,15.73 24.68,15.73 23.99,16.42 ; v1(38.98,10.97) 38.8,10.97 37.02,12.76 v1(36.72,12.76)
BUTTON1: length 24
  TOP w0.15: R17.2 37.6,19.7 37.6,18.8 37.28,18.48 37.28,17.51 38,16.78 38,16.37 38.26,16.11 38.26,16.03 v1(38.29,16)
  BOTTOM w0.15: v1(38.29,16) 38.26,16 38.07,15.81 37.04,15.81 35.99,14.76 35.74,14.76 24.77,14.76 23.75,15.78 21.78,15.78 20.52,14.52 U1.9
BUTTON2: length 35.9
  TOP w0.15: v1(12.13,11.99) 12.13,12.88 12.74,13.5 14.23,13.5 14.72,13.98 21.47,13.98 22.12,13.33 22.47,12.98 24.31,12.98 24.73,12.56 24.73,9.57 v1(24.9,9.4)
  L2 w0.15: v1(3.47,23.01) 8.03,18.45 9.26,18.45 12.13,15.58 v1(12.13,11.99)
  BOTTOM w0.15: v1(24.9,9.4) 24.82,9.48 U1.21 ; R18.2 2.87,23.01 v1(3.47,23.01)
BUZZER: length 25.6
  TOP w0.15: v1(9.09,16) 9.26,16.17 9.26,16.65 9.56,16.95 10.72,16.95 R7.2
  L2 w0.15: v1(19.57,5.67) 19.57,5.49 19.4,5.32 17.44,5.32 16.89,4.76 14.35,4.2 14.11,4.15 14.09,4.13 13.2,4.13 12.31,5.01 12.31,6.31 13.42,7.42 13.42,9.79 11.65,11.57 11.65,13.44 v1(9.09,16)
  BOTTOM w0.15: v1(19.57,5.67) 19.57,6.17 19.02,6.73 U1.31
DCDC_SW: length 4
  BOTTOM w0.2: L1.1 17.55,3.92 17.55,4.43 18.45,5.34 18.45,6.14 18.02,6.58 U1.33
DEVPACK->VDD: length 13.2
  TOP w0.3: J1.9 7.24,14.32 v1(7.28,14.28)
  L2 w0.3: v1(6.26,4.8) 6.26,6.88 6.48,7.1 6.48,13.48 v1(7.28,14.28)
  BOTTOM w0.3: v1(6.26,4.8) 6.26,5 R9.2
  BOTTOM w0.5: R9.2 6.93,5.6 7.24,5.6 7.46,5.82 R23.1
DP0: length 14.9
  TOP w0.15: v1(3.67,11.57) 3.56,11.57 3.14,11.14 J1.20
  BOTTOM w0.15: U1.38 15.38,8.48 15.25,8.36 12.66,8.36 11.93,9.09 9.96,9.09 7.69,11.36 7.44,11.36 7.19,11.36 4.12,11.36 3.91,11.57 v1(3.67,11.57)
DP1: length 17.5
  TOP w0.15: J1.18 1.78,11.78 1.44,11.44 1.44,10.85 1.81,10.48 v1(2.36,10.48)
  BOTTOM w0.15: v1(2.36,10.48) 2.62,10.48 2.89,10.75 7.87,10.75 9.3,9.32 9.83,8.79 11.8,8.79 12.61,7.98 U1.37
DP2: length 20.3
  TOP w0.15: v1(2.36,9.34) 1.63,10.07 1.63,10.07 1.35,10.35 1.35,10.35 1.14,10.56 1.14,11.77 1.52,12.15 1.52,12.15 1.78,12.41 J1.16
  BOTTOM w0.15: U1.36 16.52,7.38 16.29,7.61 12.47,7.61 11.59,8.49 9.71,8.49 8.97,9.23 8.09,10.11 6.39,10.11 5.62,9.34 v1(2.36,9.34)
DP3: length 15
  TOP w0.15: J1.14 3.53,13.05 v1(3.67,12.91)
  BOTTOM w0.15: v1(3.67,12.91) 3.67,12.66 4.67,11.66 7.07,11.66 7.32,11.66 7.56,11.66 7.81,11.66 10.08,9.39 15.02,9.39 15.11,9.48 U1.40
DP4/UART_RX: length 15.1
  TOP w0.15: v1(3.62,13.61) 3.54,13.68 J1.12
  BOTTOM w0.15: U1.41 15.19,9.98 14.9,9.69 10.2,9.69 7.94,11.96 7.44,11.96 7.19,11.96 6.94,11.96 5.87,11.96 4.22,13.61 v1(3.62,13.61)
DP5/UART_TX: length 15.3
  TOP w0.15: v1(3.67,14.31) 2.48,14.31 J1.10
  BOTTOM w0.15: v1(3.67,14.31) 3.97,14.31 6.02,12.26 6.82,12.26 6.82,12.26 7.07,12.26 7.32,12.26 8.06,12.26 10.3,10.02 11.73,10.02 12.13,10.02 12.13,10.02 14.74,10.02 15.2,10.48 U1.42
DP6/AUDIO DO: length 37.7
  TOP w0.15: v1(18.95,5.91) 18.95,6.12 18.75,6.32 17.7,6.32 15.88,4.5 14.53,4.5 13.94,5.09 11.09,5.09 v1(10.96,4.96) ; v1(1.1,14.95) J1.8
  L2 w0.15: v1(1.1,14.95) 1.22,14.83 1.22,3.36 2.86,1.72 10.54,1.72 v1(10.76,1.5)
  BOTTOM w0.15: U1.32 18.52,6.56 18.95,6.12 v1(18.95,5.91) ; v1(10.76,1.5) 10.92,1.65 10.92,4.91 v1(10.96,4.96)
DP7/AUDIO CLK: length 82.4
  TOP w0.15: J1.6 v1(1.29,15.59) ; R21.2 v1(39.82,10.59)
  L2 w0.15: v1(22.38,5.16) 22.68,4.87 27.02,4.87 30.03,7.88 36.72,7.88 37.54,7.06 37.78,7.06 40.17,9.46 40.17,10.24 v1(39.82,10.59) 39.82,11.44 39.49,11.77 35.84,11.77 34.94,12.68 29.99,12.68 27.42,15.25 v1(27.34,15.25)
  L3 w0.15: v1(9.03,1.03) 10.27,2.27 10.73,2.27 11.99,3.53 16.51,3.53 17.88,4.9 20.1,4.9 20.11,4.9 20.5,4.9 20.5,4.9 21.19,4.9 21.2,4.9 22.12,4.9 v1(22.38,5.16)
  BOTTOM w0.15: v1(1.29,15.59) 1.29,15.43 1.57,15.15 1.57,14.07 0.93,13.43 0.93,6 5.54,1.4 8.66,1.4 v1(9.03,1.03) ; U1.8 20.02,14.43 20.03,14.45 20.03,14.51 21.61,16.08 23.87,16.08 24.05,15.91 24.71,15.25 v1(27.34,15.25)
DP8/SCLK/TDI: length 38.7
  TOP w0.15: v1(4.72,12.41) 6.06,12.41 J1.15 ; v1(5.2,8.62) 5.88,7.93 P1.8
  L2 w0.15: v1(21.02,6.48) 21.02,6.35 21.37,6 21.37,5.78 21.65,5.5 22.05,5.5 22.2,5.65 22.53,5.65 23.05,6.17 26.42,6.17 26.47,6.12 v1(26.59,6.12) ; v1(5.2,8.62) 4.99,8.62 4.72,8.89 v1(4.72,12.41)
  L3 w0.15: v1(5.2,8.62) 6.94,6.88 6.94,3.78 7.51,3.21 8.56,3.21 8.84,2.94 10.56,2.94 11.74,4.13 16.16,4.13 17.17,5.14 17.17,6.16 17.53,6.52 20.98,6.52 v1(21.02,6.48)
  BOTTOM w0.15: 27.11,5.17 26.82,5.17 26.59,5.41 v1(26.59,6.12) ; U1.27 v1(21.02,6.48)
DP9/MISO: length 41
  TOP w0.15: v1(20.82,5.79) 20.99,5.79 21.04,5.75 21.4,5.75 21.65,5.5 22.05,5.5 22.19,5.64 23.43,5.64 24.47,6.68 24.47,6.93 24.85,7.31 25.29,7.31 25.86,7.89 25.86,9.29 25.68,9.48 25.68,12.46 24.55,13.58 22.72,13.58 21.14,15.17 11.64,15.17 10.24,13.76 7.82,13.76 7.11,13.05 J1.13
  BOTTOM w0.15: U10.2 25.01,4.67 25.19,4.85 25.19,6.21 25.04,6.36 22.91,6.36 21.99,5.44 21.27,5.44 20.91,5.79 ; 20.91,5.79 20.9,5.8 ; 20.91,5.79 v1(20.82,5.79) 20.82,6 20.54,6.28 20.54,6.96 20.52,6.99 U1.28
DP10/MOSI: length 40.5
  TOP w0.15: J1.11 4.99,13.68 4.19,12.88 4.19,7.71 4.07,7.59 4.07,5.08 4.92,4.23 6.86,4.23 7.83,3.26 10.39,3.26 10.52,3.39 16.15,3.39 17.23,4.47 19.58,4.47 20.11,3.95 20.6,3.95 v1(21.03,4.38) 21.58,4.38 21.97,3.99 24.48,3.99 26.01,5.52 26.89,5.52 27.33,5.95 v1(27.33,6.38)
  BOTTOM w0.15: 27.11,5.67 27.11,6.16 v1(27.33,6.38) ; U1.29 20.02,6.85 20.24,6.63 20.24,6.16 20.35,6.05 20.35,5.6 21.03,4.92 v1(21.03,4.38)
DP11/CSN: length 38.5
  TOP w0.15: v1(3.79,14.97) 6.05,14.97 J1.7
  L2 w0.15: v1(20.3,4.42) 20.17,4.29 18.42,4.29 18.22,4.08 17.99,4.03 17.89,4.01 17.66,3.96 17.1,3.84 16.14,3.62 14.83,3.33 14.54,3.05 12,3.05 11,2.05 2.96,2.05 1.52,3.49 1.52,13.52 2.97,14.97 v1(3.79,14.97)
  BOTTOM w0.15: U1.30 19.52,6.67 19.91,6.28 19.91,6 20.05,5.87 20.05,4.68 v1(20.3,4.42)
DP12/AUDIO FS/TDO: length 41.6
  TOP w0.15: J1.5 4.89,15.59 v1(4.86,15.56) ; P1.6 4.62,7.78 v1(4.67,7.84)
  L2 w0.15: v1(4.67,7.84) 4.23,8.27 4.23,14.62 4.86,15.25 v1(4.86,15.56)
  L3 w0.15: v1(4.67,7.84) 4.67,8.89 4.87,9.09 5.63,9.09 7.3,7.42 7.3,3.88 7.67,3.51 8.69,3.51 8.96,3.24 10.43,3.24 11.67,4.48 12.7,4.48 13.3,5.07 13.38,5.07 13.39,5.08 13.78,5.08 13.78,5.07 13.95,5.07 14.45,4.58 16.18,4.58 16.87,5.27 16.87,6.32 17.53,6.98 22.29,6.98 22.64,7.33 23.04,7.33 23.32,7.06 23.32,6.66 22.62,5.96 21.86,5.96 v1(21.85,5.97)
  BOTTOM w0.15: v1(21.85,5.97) 21.85,5.99 21.52,6.32 U1.26
DP ID: length 13.1
  TOP w0.15: v1(14.82,10.86) 14.16,11.51 11.84,11.51 11.54,11.81 11.54,12.33 11.1,12.76 7.92,12.76 6.94,11.78 J1.17
  BOTTOM w0.15: U1.43 14.94,10.98 v1(14.82,10.86) 14.35,10.39 13.3,10.39 R6.2
FLASH_CS: length 10.2
  BOTTOM w0.15: U1.20 22.86,9.98 22.94,9.91 25.09,9.91 25.86,9.14 25.86,7.63 25.87,7.63 25.87,7.42 25.55,7.1 25.55,5.88 25.54,5.87 25.54,4.74 24.97,4.17 U10.1 24.21,4.17 23.89,4.49 R13.1
JTAG_TCK: length 25.3
  TOP w0.15: P1.4 v1(3.35,4.82)
  L3 w0.15: v1(3.35,4.82) 3.35,3.51 4.74,2.11 9.69,2.11 10.21,2.64 10.43,2.64 10.43,2.64 10.68,2.64 11.87,3.83 16.28,3.83 17.65,5.2 19.98,5.2 19.98,5.2 20.62,5.2 20.63,5.2 21.07,5.2 21.37,5.5 21.37,5.74 21.37,5.74 21.37,6.17 21.65,6.45 22.08,6.45 22.14,6.5 v1(22.2,6.5)
  BOTTOM w0.15: v1(22.2,6.5) 22.19,6.5 22.19,6.76 22.02,6.93 U1.25
JTAG_TMS: length 38.8
  TOP w0.15: v1(2.4,7.96) 2.4,7.9 2.08,7.57 P1.2 ; v1(22.84,6.86) 22.51,6.86 22.34,7.03 20.82,7.03 20.42,6.62 17.58,6.62 16.97,6.02 14,6.02 12.39,7.63 12.39,9.13 11.39,10.13 11.39,11.39 10.93,11.85 v1(10.93,12.05)
  L2 w0.15: v1(2.4,7.96) 2.46,7.91 2.57,7.91 3.67,6.81 4.95,6.81 6.03,7.9 6.03,15.1 6.68,15.74 8.66,15.74 10.93,13.47 v1(10.93,12.05)
  BOTTOM w0.15: v1(22.84,6.86) 22.84,6.91 22.74,7.01 U1.24
LED1: length 21.1
  TOP w0.15: v1(9.09,13.25) 12.05,13.25 12.6,13.8 14.08,13.8 14.57,14.29 21.6,14.29 22.42,13.46 22.6,13.28 24.43,13.28 25.2,12.51 v1(25.2,11.98)
  BOTTOM w0.15: 8.21,13.24 9.08,13.24 v1(9.09,13.25) ; U1.16 v1(25.2,11.98)
MIC PWR: length 19.6
  TOP w0.2: v1(37.27,8.19) 37.27,8.61 37.52,8.85 C32.1 38.27,8.87 U6.5
  L2 w0.2: v1(37.27,8.19) 37.27,8.45 36.52,9.21 36.26,9.21 36.25,9.21 27.57,9.21 26.57,8.21 v1(26.48,8.21)
  BOTTOM w0.2: v1(26.48,8.21) 26.21,8.55 26.21,9.7 25.43,10.48 U1.19
MPU INT: length 16.5
  L2 w0.15: v1(30.47,8.44) 30.08,8.82 27.76,8.82 26.67,7.74 26.28,7.74 26,8.01 26,8.41 25.85,8.56 24.72,8.56 24.32,8.97 24.32,14.36 23.95,14.73 23.21,14.73 23.01,14.53 23.01,14.51 22.89,14.39 v1(22.89,14.36)
  BOTTOM w0.15: v1(30.47,8.44) 30.47,9.26 U8.12 ; v1(22.89,14.36) 22.74,14.21 U1.12
MPU PWR: length 23.4
  BOTTOM w0.2: R3.2 26.66,10.51 U8.22 ; R3.2 26.67,10.49 26.67,10.29 26.67,10.29 26.67,9.88 26.67,9.88 26.67,8.75 27.96,7.46 29.95,7.46 ; R3.2 26.57,10.59 26.13,10.59 25.74,10.98 U1.18 ; 29.95,7.46 30.32,7.46 31.72,8.87 31.72,10.95 ; 29.95,7.46 29.98,7.49 29.98,7.97 C34.1 29.95,8.74 U8.13 ; 31.72,10.95 31.27,10.95 C35.1 31.22,10.91 U8.8 ; 31.72,10.95 31.72,11.8 30.75,12.77 28.02,12.77 27.97,12.72 27.97,12.68 ; 27.97,12.68 R2.2 ; 27.97,12.68 U8.1
NRESET: length 13.1
  TOP w0.15: P1.10 v1(7.16,8.3)
  L2 w0.15: v1(7.16,8.3) 7.28,8.42 10.96,8.42 10.98,8.41 11,8.41 11.57,7.85 v1(11.57,7.76)
  BOTTOM w0.15: v1(11.57,7.76) 12.26,7.07 C17.1 13.59,7.06 R1.1 15.81,7.06 16.24,6.63 16.69,6.63 17.02,6.96 U1.35
POWER GOOD: length 16.7
  TOP w0.15: v1(7.23,9) 6.95,9 6.07,9.89 J1.19
  L3 w0.2: v1(7.23,9) 6.75,9.49 4.66,9.49 4.11,8.93 4.11,7.69 4.46,7.34 5.12,7.34 5.42,7.03 v1(5.42,3.7)
  BOTTOM w0.15: U2.B2 8.71,7.03 7.92,7.82 7.92,8.34 R28.2 7.83,8.35 7.23,8.94 v1(7.23,9) ; U11.B2 5.58,3.86 v1(5.42,3.7)
REED: length 24
  TOP w0.15: 38.86,17.15 v1(38.86,17.15) 38.55,17.46 38.55,18.11 R19.1
  BOTTOM w0.15: U1.6 19.02,14.49 21.25,16.72 23.86,16.72 23.86,16.72 24.11,16.72 24.11,16.72 24.14,16.72 24.84,16.03 28.02,16.03 28.99,15.06 35.87,15.06 36.74,15.93 36.92,16.11 37.73,16.11 38.09,16.48 38.54,16.48 38.86,16.79 v1(38.86,17.15)
RX/TX: length 10.6
  TOP w0.15: v1(19.35,16.52) 18.77,17.1 15.19,17.1 v1(14.92,17.36)
  BOTTOM w0.15: U1.3 17.52,14.65 L15.1 ; 18.68,16.52 18.68,16.52 18.68,16.73 18.66,16.71 C23.1 18.63,16.56 ; 15.87,17.28 C24.1
  BOTTOM w0.2: 15.01,17.28 v1(14.92,17.36)
  BOTTOM w0.5: L15.1 18.63,16.56 ; L16.1 15.87,17.28 ; v1(19.35,16.52) 18.68,16.52 ; C24.1 15.01,17.28
SCL: length 65.4
  TOP w0.15: v1(22.45,14.8) 21.74,15.51 11.55,15.51 11.35,15.32 11.18,15.14 8.68,15.14 v1(8.18,15.14) 8.15,15.14 7.07,16.22 J1.3 5.38,16.22 4.84,16.77 4.84,20.13 v1(6.22,21.51) ; v1(38.28,13.6) 38.72,13.6 v1(39.28,13.04)
  L2 w0.15: v1(34.39,17.81) 37,17.81 38.09,16.71 38.09,16.48 37.81,16.2 37.81,15.8 38.13,15.49 38.13,13.75 v1(38.28,13.6)
  BOTTOM w0.15: 37.05,14.16 36.24,14.16 24.52,14.16 24.17,14.51 23.85,14.83 22.69,14.83 22.69,14.83 22.66,14.83 22.63,14.8 v1(22.45,14.8) 22.2,14.8 22.17,14.83 21.86,14.83 21.52,14.49 U1.11 ; 37.05,14.16 R5.1 ; 37.05,14.16 37.52,14.16 38.07,13.6 v1(38.28,13.6) ; U3.4 6.26,21.46 v1(6.22,21.51) ; v1(8.18,15.14) 8.55,15.52 U7.4 ; v1(39.28,13.04) 39.28,12.23 40.6,10.91 40.6,10.66 40.6,9.39 38.51,7.31 35.63,7.31 34.62,6.3 U5.A1
  BOTTOM w0.2: U4.B3 v1(34.39,17.81)
SCL HP: length 5.7
  BOTTOM w0.15: U1.15 25.91,12.48 26.65,11.74 R3.1 26.94,11.06 27.09,10.91 U8.23
SDA: length 77.1
  TOP w0.15: v1(23.08,15.31) 22.57,15.81 11.42,15.81 11.05,15.44 8.8,15.44 6.96,17.28 v1(6.79,17.46) 6.76,17.46 5.38,18.85 5.38,19.91 7.46,21.99 7.52,21.99 v1(7.57,22.04) 7.5,22.11 6.15,22.11 4.54,20.5 4.54,17.01 3.75,16.22 3.59,16.22 J1.4
  L2 w0.15: v1(34.37,18.81) 36.42,18.81 38.78,16.45 38.78,15.47 38.64,15.33 v1(38.64,14.97)
  BOTTOM w0.15: v1(6.79,17.46) 6.8,17.44 6.8,16.52 U7.6 ; U1.10 21.02,14.49 21.83,15.31 v1(23.08,15.31) 23.8,15.31 24.47,14.63 24.65,14.46 35.62,14.46 36.12,14.46 37.17,15.51 38.1,15.51 v1(38.64,14.97) 38.77,14.84 R4.1 38.75,14.39 38.75,12.33 40.3,10.79 40.3,9.52 38.44,7.66 35.54,7.66 33.63,5.74 33.63,5.27 U5.A2 ; U3.3 v1(7.57,22.04)
  BOTTOM w0.2: U4.C3 v1(34.37,18.81)
SDA HP: length 6.3
  BOTTOM w0.15: U1.14 27.18,12.98 27.42,12.74 R2.1 27.47,11.36 U8.24
TMP RDY: length 23.3
  TOP w0.15: v1(26.16,11.51) 26.16,12.3 26.72,12.86 28.24,12.86 29.56,14.17 35.47,14.17 36.42,15.12 v1(36.42,17.31)
  L2 w0.15: v1(36.42,17.31) 34.13,17.31 33.37,18.07 v1(33.37,18.81)
  BOTTOM w0.15: U1.17 22.87,11.48 22.96,11.4 26.05,11.4 v1(26.16,11.51) ; v1(36.42,17.31) 36.82,17.71 36.97,17.71 R20.1
  BOTTOM w0.2: U4.C2 v1(33.37,18.81)
N256047: length 0.8
  BOTTOM w0.15: CR1.1 5.89,13.24 R16.2
N540621: length 1.3
  TOP w0.15: U6.1 38.87,12.06 R22.1
N546170: length 0.7
  BOTTOM w0.15: C36.2 31.22,10.11 U8.10
N553359: length 2.9
  TOP w0.3: Q1.3 7.97,17.06 7.27,17.76 BZ1.2
N553749: length 1.2
  TOP w0.15: R7.1 11.3,16.47 10.94,16.11 Q1.1
N553802: length 1
  TOP w0.15: 11.37,18.7 11.37,18.53 10.85,18.01 Q1.2
N567147: length 9.8
  L2 w0.5: v1(8.46,5.27) 8.05,5.27 7.28,6.04 7.28,6.76 7.35,6.84 7.35,6.86 8.4,7.91 10.72,7.91 10.76,7.95 v1(10.77,7.95)
  BOTTOM w0.3: C41.1 U2.A2
  BOTTOM w0.5: R23.2 8.21,5.02 v1(8.46,5.27) 9.3,5.27 R12.2 ; C41.1 10.06,7.95 10.08,7.93 10.75,7.93 v1(10.77,7.95)
N570925: length 1.3
  BOTTOM w0.15: U1.23 23.81,8.48 C20.1
N571021: length 6
  BOTTOM w0.15: Y1.1 21.56,17.71 21.37,17.52 C18.1 20.57,16.89 18.81,15.13 18.53,15.13 18.02,14.62 U1.4
N584167: length 6.4
  BOTTOM w0.15: U1.47 14.77,12.98 14.04,13.72 13.28,13.72 11.87,15.13 Y2.1
  BOTTOM w0.2: 11.87,16.76 11.87,15.41 Y2.1
N584795: length 7.9
  BOTTOM w0.15: U1.46 15.76,12.51 14.82,12.51 13.91,13.42 13.16,13.42 13.15,13.42 13.14,13.42 12.51,14.06 11.02,14.06 Y2.3
  BOTTOM w0.2: Y2.3 10.16,13.05 10.16,11.98
N593616: length 5
  TOP w0.15: SW1.2 38.62,19.84 38.62,19.83 R17.1
N593675: length 7.3
  TOP w0.25: v1(4.44,25.31) 4.38,25.37 4.38,27.34 3.51,28.21 SW2.2
  BOTTOM w0.2: R18.1 1.96,23.1 2.46,23.6 3.38,23.6 4.44,24.66 v1(4.44,25.31)
N595089: length 8.7
  BOTTOM w0.15: C19.1 24.94,18.15 Y1.2 24.06,17.75 23.33,17.02 21.13,17.02 18.94,14.83 18.82,14.83 18.52,14.53 U1.5
N615347: length 10.6
  TOP w0.15: U6.4 37.45,9.67 37.18,9.4 35.41,9.4 34.92,9.9 34.92,11.15 36.05,12.28 38.57,12.28 38.78,12.49 39.52,12.49 40.3,11.71 40.3,11.62 40.31,11.61 40.31,11.62 R21.1
N620089: length 1.8
  TOP w0.5: R26.1 39.63,2.42 BAT+1.1
N635643: length 5.8
  L3 w0.2: v1(8.3,4.17) 8.3,4.4 9.89,5.99 v1(9.89,6.11)
  BOTTOM w0.15: C42.1 7.98,3.86 v1(8.3,4.17)
  BOTTOM w0.2: U11.A2 7.59,3.86 C42.1 ; 10.23,6.53 10.23,6.45 v1(9.89,6.11) ; 10.23,6.53 10.76,6.53 ; 10.23,6.53 U2.A1
  BOTTOM w0.3: 10.76,6.53 C40.1
N643348: length 1.8
  BOTTOM w0.5: L7.1 17.02,17.3 C15.1 C14.2
N647149: length 1.8
  BOTTOM w0.5: 11.38,23.43 ANT2.2 ANT3.1 10.82,23.93 10.17,24.58 A1.1
N651267: length 4.2
  BOTTOM w0.15: U1.1 16.52,14.82 L16.2 15.64,15.47
  BOTTOM w0.5: 15.64,15.47 15.59,15.47 14.84,16.23 C11.1
N651373: length 1.7
  BOTTOM w0.15: 13.56,18.8 L2.1 ; 13.55,17.98 C12.2
  BOTTOM w0.5: C12.2 13.56,18.8 ; C11.2 13.55,17.98
N651497: length 3.8
  BOTTOM w0.5: ANT2.1 12.78,22.04 12.78,22.04 13.56,21.26 C13.2 13.56,19.62 L2.2
N652643: length 2.2
  BOTTOM w0.15: U1.2 17.02,15.5 C14.1
  BOTTOM w0.5: L15.2 17.57,15.5 C14.1
N654018: length 3.3
  BOTTOM w0.5: 16.73,23.94 ANT4.2 14.58,23.94 ANT5.1 14.57,25.06 A2.1
  vias: v2(14.6,30.95) v2(16.6,30.95) v2(16.6,25.96) v2(18.6,30.95) v2(18.6,25.96) v2(20.6,30.95) v2(20.6,25.96) v2(22.6,30.95) v2(22.6,25.96) v2(24.6,30.95) v2(24.6,25.96) v2(26.6,30.95) v2(26.6,25.96) v2(28.6,30.95) v2(28.6,25.96) v2(30.6,30.95) v2(30.6,25.96) v2(32.6,30.97) v2(32.6,25.96) v2(34.6,25.93)
N667700: length 4.5
  BOTTOM w0.5: C16.1 15.9,19.07 L7.2 17.02,19.99 17.53,20.51 R10.2
N684660: length 1.5
  BOTTOM w0.5: R10.1 15.78,22.18 15.36,21.76 J10.1
N686248: length 0.9
  BOTTOM w0.5: J12.1 11.04,21.81 R24.1
N721382: length 3
  TOP w0.15: U9.2 40.64,16.07 39.27,17.44 39.27,18.18
N6819820: length 0.9
  BOTTOM w0.5: ANT4.1 17.53,23.94 R11.1

## Copper pours and planes (outline as drawn; the poured copper is in the pictures)
GND on TOP: 18.62,3.31 14.58,2.34 10.85,0.5 0.5,0.5 0.5,24.93 41.5,24.93 41.5,0.5 31.15,0.5 25.14,3 18.64,3.31 ; 14 cut-outs
GND on BOTTOM: 0.5,0.5 0.5,31.5 2.2,31.5 2.2,30.5 4.2,30.5 4.2,31.5 37.8,31.52 37.8,30.5 39.8,30.5 39.8,31.5 41.5,31.5 41.5,0.5 31.15,0.5 21,3.46 10.85,0.5 ; 6 cut-outs
GND on L2: 0.5,0.5 0.5,24.92 16.71,24.92 16.71,30.45 1.35,30.45 1.35,31.5 2.2,31.5 2.2,30.5 4.2,30.5 4.2,31.5 37.8,31.52 37.8,30.5 39.8,30.5 39.8,31.5 41.5,31.5 41.5,0.5 31.15,0.5 21,3.46 10.85,0.5 ; 8 cut-outs
GND on L3: 0.5,0.5 0.5,24.92 14.55,24.92 14.55,25.36 41.5,25.36 41.5,0.5 31.15,0.5 21,3.46 10.85,0.5 ; 5 cut-outs
VDD_BATT on TOP, BOTTOM: 8.72,4.81 8.72,3.41 10.72,3.41 10.72,4.81
Net_8 on BOTTOM (solid shape): 1.02,27.18 3.02,27.18 3.02,29.82 5.72,29.82 5.72,27.18 7.72,27.18 7.72,29.82 12.72,29.82 12.72,24.92 11.82,24.92 11.82,29.32 10.42,29.32 10.42,24.92 9.92,24.92 9.92,29.32 8.22,29.32 8.22,26.68 5.22,26.68 5.22,29.32 3.52,29.32 3.52,26.68 0.52,26.68 0.52,31.5 1.02,31.5
N654018 on TOP (solid shape): 14.25,30.6 14.25,31.31 14.95,31.31 15.97,30.29 16.08,30.13 16.11,29.94 16.11,27.15 16.95,26.31 16.95,25.6 16.25,25.6 15.26,26.59 15.15,26.75 15.11,26.94 15.11,29.73
N654018 on TOP (solid shape): 16.25,30.6 16.25,31.31 16.95,31.31 17.97,30.29 18.07,30.13 18.11,29.94 18.11,27.15 18.95,26.31 18.95,25.6 18.24,25.6 17.26,26.59 17.15,26.75 17.11,26.94 17.11,29.73
N654018 on TOP (solid shape): 18.24,30.6 18.24,31.31 18.95,31.31 19.96,30.29 20.07,30.13 20.11,29.94 20.11,27.15 20.95,26.31 20.95,25.6 20.24,25.6 19.26,26.59 19.15,26.75 19.11,26.94 19.11,29.73
N654018 on TOP (solid shape): 20.25,30.6 20.25,31.31 20.95,31.31 21.97,30.29 22.07,30.13 22.11,29.94 22.11,27.15 22.95,26.31 22.95,25.6 22.24,25.6 21.26,26.59 21.15,26.75 21.11,26.94 21.11,29.73
N654018 on TOP (solid shape): 22.24,30.6 22.24,31.31 22.95,31.31 23.97,30.29 24.07,30.13 24.11,29.94 24.11,27.15 24.95,26.31 24.95,25.6 24.24,25.6 23.26,26.59 23.15,26.75 23.11,26.94 23.11,29.73
N654018 on TOP (solid shape): 24.24,30.6 24.24,31.31 24.95,31.31 25.96,30.29 26.07,30.13 26.11,29.94 26.11,27.15 26.95,26.31 26.95,25.6 26.24,25.6 25.26,26.59 25.15,26.75 25.11,26.94 25.11,29.73
N654018 on TOP (solid shape): 26.25,30.6 26.25,31.31 26.95,31.31 27.97,30.29 28.07,30.13 28.11,29.94 28.11,27.15 28.95,26.31 28.95,25.6 28.24,25.6 27.26,26.59 27.15,26.75 27.11,26.94 27.11,29.73
N654018 on TOP (solid shape): 28.24,30.6 28.24,31.31 28.95,31.31 29.96,30.29 30.07,30.13 30.11,29.94 30.11,27.15 30.95,26.31 30.95,25.6 30.24,25.6 29.26,26.59 29.15,26.75 29.11,26.94 29.11,29.73
N654018 on TOP (solid shape): 30.25,30.6 30.25,31.31 30.95,31.31 31.97,30.29 32.07,30.13 32.11,29.94 32.11,27.15 32.95,26.31 32.95,25.6 32.24,25.6 31.26,26.59 31.15,26.75 31.11,26.94 31.11,29.73
N654018 on TOP (solid shape): 32.24,30.61 32.24,31.31 32.95,31.31 33.96,30.3 34.07,30.14 34.11,29.95 34.11,27.15 34.95,26.31 34.95,25.61 34.24,25.61 33.26,26.59 33.15,26.75 33.11,26.95 33.11,29.74
N654018 on BOTTOM (solid shape): 14.1,30.95 14.6,31.45 15.1,30.95 15.1,24.57 14.1,24.57
N654018 on BOTTOM (solid shape): 16.1,30.95 16.6,31.45 17.1,30.95 17.1,25.96 16.6,25.46 16.1,25.96
N654018 on BOTTOM (solid shape): 18.1,30.95 18.6,31.45 19.1,30.95 19.1,25.96 18.6,25.46 18.1,25.96
N654018 on BOTTOM (solid shape): 20.1,30.95 20.6,31.45 21.1,30.95 21.1,25.96 20.6,25.46 20.1,25.96
N654018 on BOTTOM (solid shape): 22.1,30.95 22.6,31.45 23.1,30.95 23.1,25.96 22.6,25.46 22.1,25.96
N654018 on BOTTOM (solid shape): 24.1,30.95 24.6,31.45 25.1,30.95 25.1,25.96 24.6,25.46 24.1,25.96
N654018 on BOTTOM (solid shape): 26.1,30.95 26.6,31.45 27.1,30.95 27.1,25.96 26.6,25.46 26.1,25.96
N654018 on BOTTOM (solid shape): 28.1,30.95 28.6,31.45 29.1,30.95 29.1,25.96 28.6,25.46 28.1,25.96
N654018 on BOTTOM (solid shape): 30.1,30.95 30.6,31.45 31.1,30.95 31.1,25.96 30.6,25.46 30.1,25.96
N654018 on BOTTOM (solid shape): 32.1,30.95 32.6,31.45 33.1,30.95 33.1,25.96 32.6,25.46 32.1,25.96
N654018 on BOTTOM (solid shape): 34.1,30.97 34.6,31.47 35.1,30.97 35.1,25.97 34.6,25.47 34.1,25.97

## Text on the board
Ref Des/Silkscreen Bottom: NEG | VER: 1.5 | CC1350STK | POS
Ref Des/Silkscreen Top: NEG | POS
XSECTION_CHART: *  SURFACE - AIR 0 MM | L1: TOP CONDUCTOR - COPPER 0.035 MM | *  DIELECTRIC - FR-4 0.175 MM | L2: L2 PLANE - COPPER 0.035 MM | *  DIELECTRIC - FR-4 1.01 MM | L3: L3 PLANE - COPPER 0.035 MM | L4: BOTTOM CONDUCTOR - COPPER 0.035 MM | DESIGN CROSS SECTION CHART | ___________________________ | TOTAL THICKNESS 1.5 MM
DEVICE_TYPE_TOP: 1 | 10
DIMENSION: FIGURE | SIZE | 0.2 | 0.4 | 0.9 | 0.325 | 0.6 | 3.0x1.0 | DRILL CHART: TOP to BOTTOM | ALL UNITS ARE IN MILLIMETERS | PLATED | NON-PLATED | QTY | 300 | 20 | 4 | 1 | 2
